# Altium PCB Project2_B.PcbDoc
Units mil, origin at the board's own origin, x right, y up, seen from the top; angles counter-clockwise.
Board outline 6000 x 4000 mil, 2 copper layers (Top Layer, Bottom Layer); 93 components, 85 nets, 391 pads, 12 vias.
Unrouted connection lines stored in the file: 248.
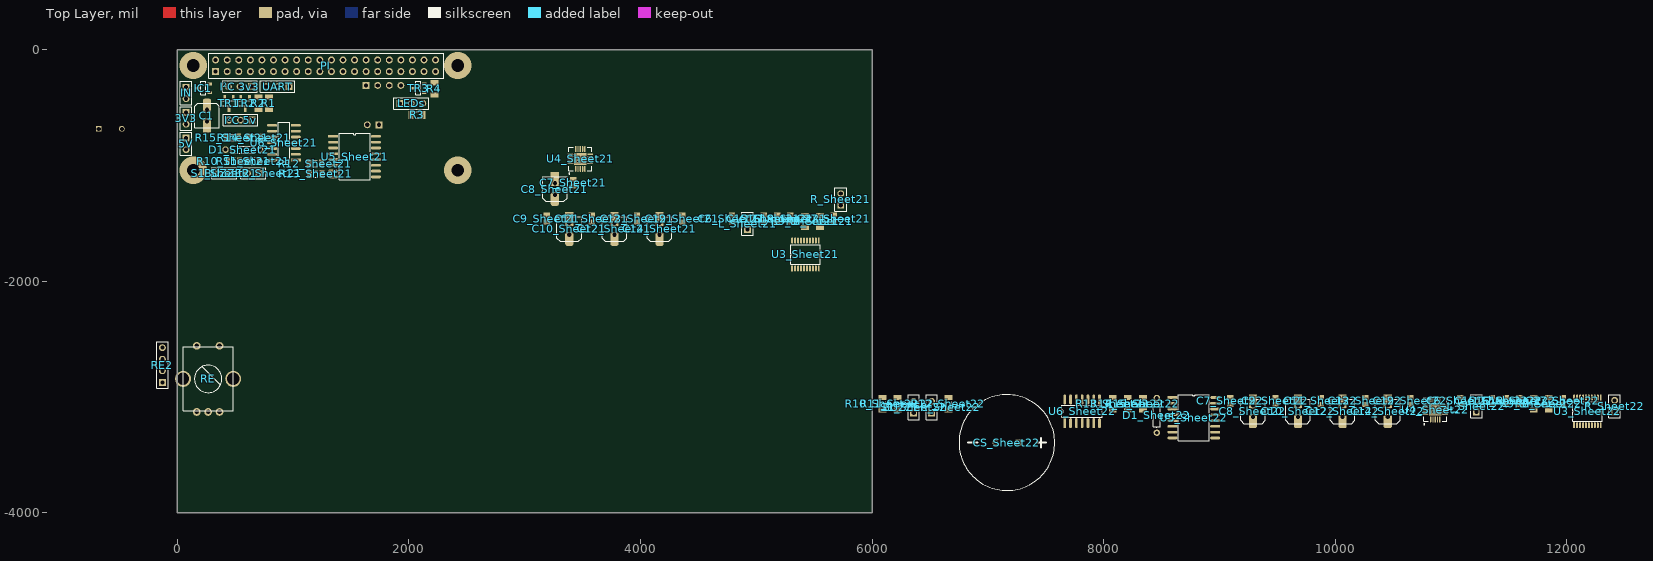
[diagram p0: Top Layer view]
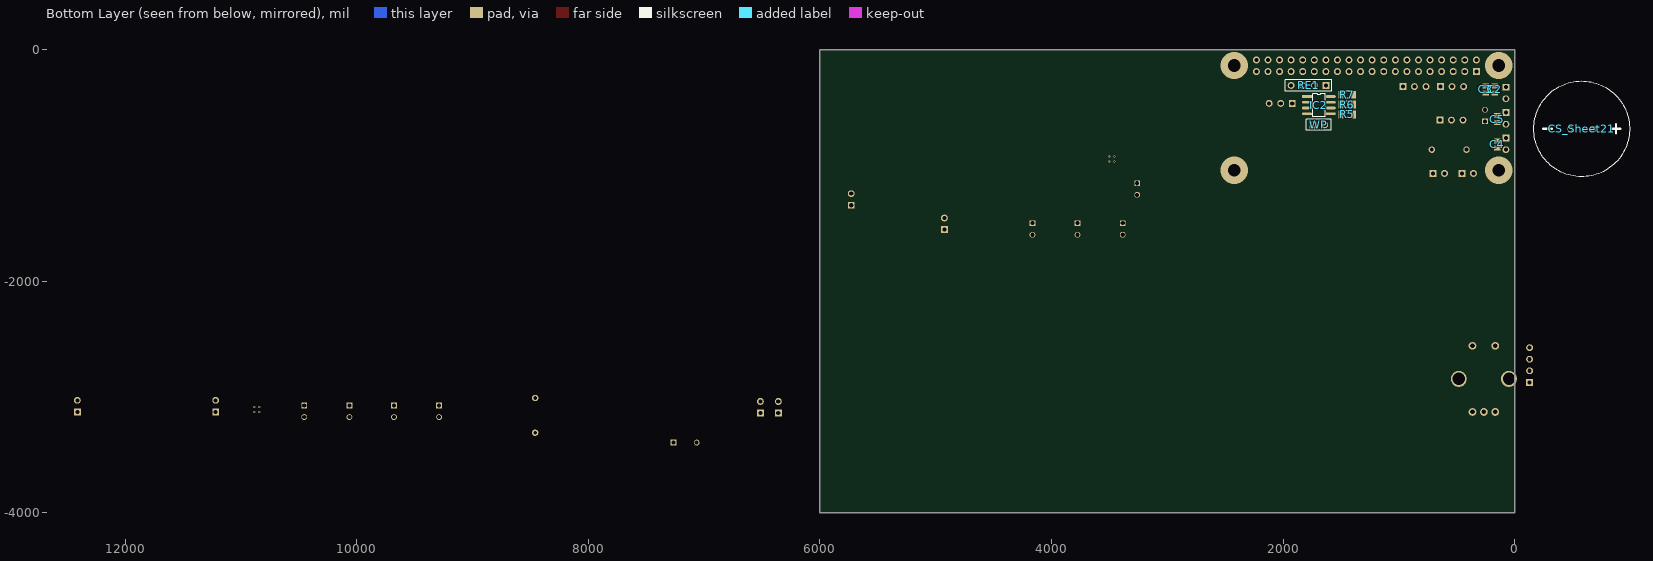
[diagram p1: Bottom Layer view, seen from below]

## Layer stack, top to bottom
Top Solder: solder mask 0.4, Solder Resist, Dk 3.5
Top Layer: signal copper 1.4
Dielectric 1: dielectric 12.6, FR-4, Dk 4.8
Bottom Layer: signal copper 1.4
Bottom Solder: solder mask 0.4, Solder Resist, Dk 3.5

## Board outline
0,-4000 6000,-4000 6000,0 0,0

## Design rules (kind name [scope] priority, off if disabled: settings)
Clearance [All] p1: gap=10
PolygonConnect [All] p1: connectstyle=Relief reliefconductorwidth=10 reliefentries=4 polygonreliefangle="90 Angle" airgapwidth=10
RoutingVias [All] p1: holewidth=28 width=50 viastyle="Through Hole" minholewidth=28 minwidth=50 maxholewidth=28 maxwidth=50
SolderMaskExpansion [All] p1: expansion=4
Width [All] p1: maxlimit=10 minlimit=10 preferedwidth=10
30 further rules are at their usual default settings.

## Classes and differential pairs
channel class Sheet2: Sheet21 Sheet22

## Components (designator, comment, footprint, x,y, rotation, side; value= is the part's Value field where it differs from the comment)
3V3 "" HDR1X2#1 75,-545 r270 top
5V "" HDR1X2#1 75,-765 r270 top
BUZZER_Sheet21 "" HDR1X2#2 705,-1070 r180 top (schematic designator BUZZER)
BUZZER_Sheet22 "" HDR1X2#2 6515,-3140 r90 top (schematic designator BUZZER)
C1 "" "SMD cap 6x5" 255,-570 r270 top
C2 "" C0805 170,-345 r270 bottom
C3 "" C0805 250,-345 r270 bottom
C4 "" C0805 150,-820 r90 bottom
C5 "" C0805 150,-600 r270 bottom
C6_Sheet21 "" C0805 4790,-1460 r90 top (schematic designator C6)
C6_Sheet22 "" C0805 11080,-3035 r90 top (schematic designator C6)
C7_Sheet21 "" C0805 3420,-1150 r270 top (schematic designator C7)
C7_Sheet22 "" C0805 9095,-3035 r90 top (schematic designator C7)
C8_Sheet21 "" "SMD cap 6x5" 3260,-1205 r90 top (schematic designator C8)
C8_Sheet22 "" "SMD cap 6x5" 9290,-3125 r90 top (schematic designator C8)
C9_Sheet21 "" C0805 3190,-1460 r90 top (schematic designator C9)
C9_Sheet22 "" C0805 9485,-3035 r90 top (schematic designator C9)
C10_Sheet21 "" "SMD cap 6x5" 3385,-1550 r90 top (schematic designator C10)
C10_Sheet22 "" "SMD cap 6x5" 9680,-3125 r90 top (schematic designator C10)
C11_Sheet21 "" C0805 3580,-1460 r90 top (schematic designator C11)
C11_Sheet22 "" C0805 9875,-3035 r90 top (schematic designator C11)
C12_Sheet21 "" "SMD cap 6x5" 3775,-1550 r90 top (schematic designator C12)
C12_Sheet22 "" "SMD cap 6x5" 10065,-3125 r90 top (schematic designator C12)
C13_Sheet21 "" C0805 3970,-1460 r90 top (schematic designator C13)
C13_Sheet22 "" C0805 10260,-3035 r90 top (schematic designator C13)
C14_Sheet21 "" "SMD cap 6x5" 4165,-1550 r90 top (schematic designator C14)
C14_Sheet22 "" "SMD cap 6x5" 10455,-3125 r90 top (schematic designator C14)
C15_Sheet21 "" C0805 5065,-1460 r90 top (schematic designator C15)
C15_Sheet22 "" C0805 11355,-3035 r90 top (schematic designator C15)
C16_Sheet21 "" C0805 5180,-1460 r90 top (schematic designator C16)
C16_Sheet22 "" C0805 11475,-3035 r90 top (schematic designator C16)
C17_Sheet21 "" C0805 5670,-1460 r90 top (schematic designator C17)
C17_Sheet22 "" C0805 11965,-3035 r90 top (schematic designator C17)
C18_Sheet21 "" C0805 5295,-1460 r90 top (schematic designator C18)
C18_Sheet22 "" C0805 11590,-3035 r90 top (schematic designator C18)
C19_Sheet21 "" C0805 4360,-1460 r90 top (schematic designator C19)
C19_Sheet22 "" C0805 10650,-3035 r90 top (schematic designator C19)
CS_Sheet21 "Supercap" Supercap -580,-685 r180 bottom (schematic designator CS)
CS_Sheet22 "Supercap" Supercap 7165,-3395 r0 top (schematic designator CS)
D1_Sheet21 "" AXIAL-0.3 565,-865 r0 top (schematic designator D1)
D1_Sheet22 "" AXIAL-0.3 8460,-3160 r90 top (schematic designator D1)
IC1 "3v3" SOT-23A 225,-335 r90 top
IC2 "I²C SERIAL EEPROM" SOIC-8 1690,-480 r180 bottom
IN "" HDR1X2#1 75,-325 r270 top
"I²C 3v3" "" HDR1X3 640,-320 r180 top
"I²C 5v" "" HDR1X3 645,-610 r180 top
L_Sheet21 "" HDR1X2#1 4925,-1555 r90 top (schematic designator L)
L_Sheet22 "" HDR1X2#1 11220,-3130 r90 top (schematic designator L)
LEDs "WS2812" HDR1X3 1920,-465 r0 top
PI "Raspberry Pi v2" HDR2x10 1280,-140 r90 top locked
R1 "" C1206 790,-465 r90 top
R2 "" C1206 700,-465 r90 top
R3 "" C1206 2070,-565 r180 top
R4 "" C1206 2220,-340 r90 top
R5 "" C1206 1445,-560 r180 bottom
R6 "" C1206 1445,-475 r180 bottom
R7 "" C1206 1445,-390 r180 bottom
R8_Sheet21 "" C1206 5550,-1485 r90 top (schematic designator R8)
R8_Sheet22 "" C1206 11845,-3060 r90 top (schematic designator R8)
R9_Sheet21 "" C1206 5420,-1485 r90 top (schematic designator R9)
R9_Sheet22 "" C1206 11715,-3060 r90 top (schematic designator R9)
R10_Sheet21 "" C1206 485,-965 r180 top (schematic designator R10)
R10_Sheet22 "" C1206 6090,-3060 r90 top (schematic designator R10)
R11_Sheet21 "" C1206 655,-965 r180 top (schematic designator R11)
R11_Sheet22 "" C1206 6220,-3060 r90 top (schematic designator R11)
R12_Sheet21 "" C1206 1190,-985 r0 top (schematic designator R12)
R12_Sheet22 "" C1206 6660,-3060 r90 top (schematic designator R12)
R13_Sheet21 "" C1206 1195,-1075 r0 top (schematic designator R13)
R13_Sheet22 "" C1206 8080,-3060 r90 top (schematic designator R13)
R14_Sheet21 "" C1206 665,-760 r180 top (schematic designator R14)
R14_Sheet22 "" C1206 8210,-3060 r90 top (schematic designator R14)
R15_Sheet21 "" C1206 475,-760 r180 top (schematic designator R15)
R15_Sheet22 "" C1206 8340,-3060 r90 top (schematic designator R15)
R_Sheet21 "" HDR1X2#1 5730,-1345 r90 top (schematic designator R)
R_Sheet22 "" HDR1X2#1 12415,-3130 r90 top (schematic designator R)
RE "" EC11E-WP 265,-2845 r0 top
RE1 "RotaryEncoder" HDR1X4 1630,-310 r0 bottom
RE2 "RotaryEncoder" HDR1X4 -130,-2875 r90 top
S1_Sheet21 "Alarm reset" HDR1X2#2 455,-1070 r180 top (schematic designator S1)
S1_Sheet22 "Alarm reset" HDR1X2#2 6360,-3140 r90 top (schematic designator S1)
TR1 "Level shifter" SOT-23A 445,-465 r180 top
TR2 "Level shifter" SOT-23A 585,-465 r180 top
TR3 "Level shifter" SOT-23A 2080,-335 r90 top
U3_Sheet21 "I²S DAC" TSSOP-20 5310,-1890 r90 top (schematic designator U3)
U3_Sheet22 "I²S DAC" TSSOP-20 12065,-3245 r90 top (schematic designator U3)
U4_Sheet21 "TPA2016D2" QFN20-tpa2016d2 3480,-945 r90 top (schematic designator U4)
U4_Sheet22 "TPA2016D2" QFN20-tpa2016d2 10865,-3110 r90 top (schematic designator U4)
U5_Sheet21 "DS3231 RTC" "DS3231 SO-16" 1530,-925 r0 top (schematic designator U5)
U5_Sheet22 "DS3231 RTC" "DS3231 SO-16" 8780,-3180 r0 top (schematic designator U5)
U6_Sheet21 "NOR gates" SOIC-14 920,-805 r180 top (schematic designator U6)
U6_Sheet22 "NOR gates" SOIC-14 7815,-3125 r90 top (schematic designator U6)
UART "" HDR1X3 965,-320 r180 top
WP "Jumper" HDR1X2#2 1740,-650 r180 bottom

## Footprints (in the part's own frame and the unit in brackets; to place one, negate y for a bottom-side part, rotate by r counter-clockwise, add the part's x,y. Pads: shape width x height; smd on the part's side, far side on the other; paste and mask are expansions set on the pad)
AXIAL-0.3 [mm] "Axial Device, Thru-Hole; 2 Leads; 0.3 in Pin Spacing"
  round 1.4 hole 0.85: 1(-3.81,0) 2(3.81,0)
  silkscreen extent -2.77,-0.76 2.77,0.76
C0805 [mm] "Chip Capacitor, Body 2.0x1.3mm, IPC High Density"
  rect 1.1x1.4 smd: 1(-0.75,0) 2(0.75,0)
  body extent -1.1,-0.72 1.1,0.72, height 1.4
C1206 [mm] "Chip Capacitor, Body 3.2x1.6mm, IPC High Density"
  rect 1.1x1.7 smd: 1(-1.35,0) 2(1.35,0)
  silkscreen extent -0.4,-0.75 0.4,0.75, body extent -1.7,-0.9 1.7,0.9, height 1.3
"DS3231 SO-16" [mm]
  rect 2.2x0.6 smd: 1(-4.685,4.445)
  oval 2.2x0.6 smd: 2(-4.685,3.175) 3(-4.685,1.905) 4(-4.685,0.635) 5(-4.685,-0.635) 6(-4.685,-1.905) 7(-4.685,-3.175) 8(-4.685,-4.445) 9(4.685,-4.445) 10(4.685,-3.175) 11(4.685,-1.905) 12(4.685,-0.635) 13(4.685,0.635) 14(4.685,1.905) 15(4.685,3.175) 16(4.685,4.445)
  silkscreen extent -3.38,-5.08 3.41,5.08
EC11E-WP [mm] "With push button"
  round 3.5 hole 2.7: 0(-5.5,0) 0(5.5,0)
  round 1.7 hole 1: 1(-2.5,-7.25) 2(0,-7.25) 3(2.5,-7.25) 4(-2.5,7.25) 5(2.5,7.25)
  silkscreen extent -5.5,-7 5.5,7
HDR1X2#1 [mm] "Connector; Header; 2 Position"
  rect 1.5x1.5 hole 0.9: 1(0,0)
  round 1.5 hole 0.9: 2(2.54,0)
  silkscreen extent -1.27,-1.27 3.81,1.27
HDR1X2#2 [mm] "2 Pin Header"
  rect 1.524x1.524 hole 0.9: 1(0,0)
  round 1.524 hole 0.9: 2(2.54,0)
  silkscreen extent -1.5,-1.2 4,1.2
HDR1X3 [mm] "Connector; Header; 3 Position"
  rect 1.5x1.5 hole 0.9: 1(0,0)
  round 1.5 hole 0.9: 2(2.54,0) 3(5.08,0)
  silkscreen extent -1.27,-1.27 6.35,1.27
HDR1X4 [mm] "Connector; Header; 4 Position"
  rect 1.5x1.5 hole 0.9: 1(0,0)
  round 1.5 hole 0.9: 2(2.54,0) 3(5.08,0) 4(7.62,0)
  silkscreen extent -1.27,-1.27 8.89,1.27
HDR2x10 [mil] "20 pin Header"
  rect 60x60 hole 35.43: 1(-50,950)
  round 60 hole 35.43: 2(50,950) 3(-50,850) 4(50,850) 5(-50,750) 6(50,750) 7(-50,650) 8(50,650) 9(-50,550) 10(50,550) 11(-50,450) 12(50,450) 13(-50,350) 14(50,350) 15(-50,250) 16(50,250) 17(-50,150) 18(50,150) 19(-50,50) 20(50,50) 21(-50,-50) 22(50,-50) 23(-50,-150) 24(50,-150) 25(-50,-250) 26(50,-250) 27(-50,-350) 28(50,-350) 29(-50,-450) 30(50,-450) 31(-50,-550) 32(50,-550) 33(-50,-650) 34(50,-650) 35(-50,-750) 36(50,-750) 37(-50,-850) 38(50,-850) 39(-50,-950) 40(50,-950)
  silkscreen extent -109,-1019 107,1009
QFN20-tpa2016d2 [mm] "QFN, 20-Leads, Body 4,77x4,77mm, Pitch 0,50mm, Thermal Pad 2,70x2,70mm, IPC Low Density"
  rect 2.7x2.7 smd: 0(0,0)
  oct 1.3x0.3 smd: 1(-2.175,1)
  oval 1.3x0.3 smd: 2(-2.175,0.5) 3(-2.175,0) 4(-2.175,-0.5) 5(-2.175,-1) 11(2.175,-1) 12(2.175,-0.5) 13(2.175,0) 14(2.175,0.5) 15(2.175,1)
  oval 0.3x1.3 smd: 6(-1,-2.175) 7(-0.5,-2.175) 8(0,-2.175) 9(0.5,-2.175) 10(1,-2.175) 16(1,2.175) 17(0.5,2.175) 18(0,2.175) 19(-0.5,2.175) 20(-1,2.175)
  silkscreen extent -3.32,-2.55 2.55,2.55, body extent -2.4,-2.4 2.4,2.4, height 0.8
"SMD cap 6x5" [mm]
  rrect50% 3x1.8 smd: 1(-2.2,0)
  round 1.27 hole 0.9: 1(-1.27,0)
  rect 1.27x1.27 hole 0.9: 2(1.27,0)
  rect 3x1.8 smd: 2(2.2,0)
  silkscreen extent -2.7,-2.7 2.7,2.7
SOIC-8 [mm]
  rect 2.2x0.6 smd: 1(-2.6,1.905)
  oval 2.2x0.6 smd: 2(-2.6,0.635) 3(-2.6,-0.635) 4(-2.6,-1.905) 5(2.6,-1.905) 6(2.6,-0.635) 7(2.6,0.635) 8(2.6,1.905)
  silkscreen extent -1.33,-2.54 1.34,2.54
SOIC-14 [mm]
  rect 2.2x0.6 smd: 1(-2.6,3.81)
  oval 2.2x0.6 smd: 2(-2.6,2.54) 3(-2.6,1.27) 4(-2.6,0) 5(-2.6,-1.27) 6(-2.6,-2.54) 7(-2.6,-3.81) 8(2.6,-3.81) 9(2.6,-2.54) 10(2.6,-1.27) 11(2.6,0) 12(2.6,1.27) 13(2.6,2.54) 14(2.6,3.81)
  silkscreen extent -1.3,-4.44 1.3,4.44
SOT-23A [mm]
  rrect50% 0.6x1 smd: 1(-0.95,-1.35)
  rect 0.6x1 smd: 2(0.95,-1.35) 3(0,1.35)
  silkscreen extent -1.45,-0.55 1.55,0.55
Supercap [mm] "Supercap"
  rect 1.27x1.27 hole 0.9: 1(2.54,0)
  round 1.27 hole 0.9: 2(-2.54,0)
  silkscreen extent -10.5,-10.5 10.5,10.5
TSSOP-20 [mm]
  rect 1.3x0.4 smd: 1(0,0)
  oval 1.3x0.4 smd: 2(0,-0.65) 3(0,-1.3) 4(0,-1.95) 5(0,-2.6) 6(0,-3.25) 7(0,-3.9) 8(0,-4.55) 9(0,-5.2) 10(0,-5.85) 11(6.1,-5.85) 12(6.1,-5.2) 13(6.1,-4.55) 14(6.1,-3.9) 15(6.1,-3.25) 16(6.1,-2.6) 17(6.1,-1.95) 18(6.1,-1.3) 19(6.1,-0.65) 20(6.1,0)
  silkscreen extent 0.9,-6.18 5.2,0.33

## Part data
3V3 5V IN L_Sheet21 L_Sheet22 R_Sheet21 R_Sheet22: library part "Header 2", "Header, 2-Pin"
BUZZER_Sheet21 BUZZER_Sheet22: library part Bell, "Electrical Bell"
C1 CS_Sheet21 CS_Sheet22: library part "Cap Pol1", "Polarized Capacitor (Radial)"
C2 C3 C4 C5 C6_Sheet21 C6_Sheet22 C7_Sheet21 C7_Sheet22 C9_Sheet21 C9_Sheet22 C11_Sheet21 C11_Sheet22 C13_Sheet21 C13_Sheet22 C15_Sheet21 C15_Sheet22 C16_Sheet21 C16_Sheet22 C17_Sheet21 C17_Sheet22 C18_Sheet21 C18_Sheet22 C19_Sheet21 C19_Sheet22: library part Cap, "Capacitor"
C8_Sheet21 C8_Sheet22 C10_Sheet21 C10_Sheet22 C12_Sheet21 C12_Sheet22 C14_Sheet21 C14_Sheet22: library part "Cap Pol2", "Polarized Capacitor (Axial)"
D1_Sheet21 D1_Sheet22: library part Diode, "Default Diode"
IC1: library part MCP1703, "Power regulator"
"I²C 3v3" "I²C 5v" LEDs UART: library part "Header 3", "Header, 3-Pin"
PI: library part RaspberryPiV2, "Raspberry Pi v2 Header"
R1 R2 R3 R4 R5 R6 R7 R8_Sheet21 R8_Sheet22 R9_Sheet21 R9_Sheet22 R10_Sheet21 R10_Sheet22 R11_Sheet21 R11_Sheet22 R12_Sheet21 R12_Sheet22 R13_Sheet21 R13_Sheet22 R14_Sheet21 R14_Sheet22 R15_Sheet21 R15_Sheet22: library part Res2, "Resistor"
RE: library part RotaryEncoder
RE1 RE2: library part "Header 4", "Header, 4-Pin"
S1_Sheet21 S1_Sheet22: library part SW-PB, "Switch"
TR1 TR2 TR3: library part AN10441, "Level Shifter"
U3_Sheet21 U3_Sheet22: library part PCM5102A
U4_Sheet21 U4_Sheet22: "I²C Audio Amplifier"
U5_Sheet21 U5_Sheet22: library part DS3231, "RTC"
U6_Sheet21 U6_Sheet22: library part 744002, "Dual 4-input NOR gate"

## Via types
v1: diameter 19.68, hole 7.87, Top Layer to Bottom Layer, 8 vias
v2: diameter 236.22, hole 108.27, Top Layer to Bottom Layer, 4 vias

## Nets (pads, with @x,y where several pads share a name; then routed paths per layer and width w, separated by ;. In a path a pad name is that pad's centre, name@x,y a point inside that pad or via, vN(x,y) a via of type N, cw(c..) or ccw(c..) an arc to the next point about the centre after c; other vN are vias at no path point)
3V3: 3V3.1 C3.2 C5.1 C7_Sheet21.1 C7_Sheet22.1 C8_Sheet21.1 C8_Sheet22.1 C9_Sheet21.1 C9_Sheet22.1 C10_Sheet21.1 C10_Sheet22.1 C11_Sheet21.2 C11_Sheet22.2 C12_Sheet21.1 C12_Sheet22.1 C13_Sheet21.1 C13_Sheet22.1 C14_Sheet21.1 C14_Sheet22.1 IC1.2 U3_Sheet21.1 U3_Sheet21.8 U3_Sheet21.18 U3_Sheet21.20 U3_Sheet22.1 U3_Sheet22.8 U3_Sheet22.18 U3_Sheet22.20
3V3PI: IC2.8 PI.1 PI.17 R4.1 R5.2 R6.2 R7.2 TR1.1 TR2.1 TR3.1
5V: 5V.1 C1.1 C2.2 C4.2 D1_Sheet21.1 D1_Sheet22.1 IC1.3 IN.1 LEDs.3 PI.2 PI.4 R1.2 R2.2 R3.1 U4_Sheet21.4 U4_Sheet21.5 U4_Sheet21.11 U4_Sheet21.12 U4_Sheet21.13 U4_Sheet22.4 U4_Sheet22.5 U4_Sheet22.11 U4_Sheet22.12 U4_Sheet22.13 U5_Sheet21.2 U5_Sheet22.2
5VBCK: CS_Sheet21.1 CS_Sheet22.1 R15_Sheet21.2 R15_Sheet22.2 S1_Sheet21.1 S1_Sheet22.1 U5_Sheet21.14 U5_Sheet22.14 U6_Sheet21.14 U6_Sheet22.14
BUZZ: PI.37 R12_Sheet22.2 R13_Sheet22.2
"CE 0": PI.24
"CE 1": PI.26
CLK: PI.12 U3_Sheet22.13
DC: PI.15
DIN: PI.38
DOUT: PI.40 U3_Sheet22.14
FS: PI.35 U3_Sheet22.15
GND: 3V3.2 5V.2 "I²C 3v3.1" "I²C 5v.1" BUZZER_Sheet21.2 BUZZER_Sheet22.2 C1.2 C2.1 C3.1 C4.1 C5.2 C6_Sheet21.1 C6_Sheet22.1 C7_Sheet21.2 C7_Sheet22.2 C8_Sheet21.2 C8_Sheet22.2 C9_Sheet21.2 C9_Sheet22.2 C10_Sheet21.2 C10_Sheet22.2 C11_Sheet21.1 C11_Sheet22.1 C12_Sheet21.2 C12_Sheet22.2 C13_Sheet21.2 C13_Sheet22.2 C14_Sheet21.2 C14_Sheet22.2 C15_Sheet21.2 C15_Sheet22.2 C16_Sheet21.2 C16_Sheet22.2 CS_Sheet21.2 CS_Sheet22.2 IC1.1 IC2.1 IC2.2 IC2.3 IC2.4 IN.2 LEDs.1 PI.6 PI.9 PI.14 PI.20 PI.25 PI.30 PI.34 PI.39 R11_Sheet21.1 R11_Sheet22.1 R12_Sheet21.1 R12_Sheet22.1 RE1.4 U3_Sheet21.3 U3_Sheet21.9 U3_Sheet21.10 U3_Sheet21.11 U3_Sheet21.12 U3_Sheet21.16 U3_Sheet21.19 U3_Sheet22.3 U3_Sheet22.9 U3_Sheet22.10 U3_Sheet22.11 U3_Sheet22.12 U3_Sheet22.16 U3_Sheet22.19 U4_Sheet21.1 U4_Sheet21.3 U4_Sheet21.8 U4_Sheet22.1 U4_Sheet22.3 U4_Sheet22.8 U5_Sheet21.13 U5_Sheet22.13 U6_Sheet21.3 U6_Sheet21.7 U6_Sheet21.10 U6_Sheet22.3 U6_Sheet22.7 U6_Sheet22.10 UART.1 WP.1
MISO: PI.21
MOSI: PI.19
NetBUZZER_Sheet21_1: BUZZER_Sheet21.1 R13_Sheet21.1 U6_Sheet21.1 U6_Sheet21.9
NetBUZZER_Sheet22_1: BUZZER_Sheet22.1 R13_Sheet22.1 U6_Sheet22.1 U6_Sheet22.9
NetC6_Sheet21_2: C6_Sheet21.2 U3_Sheet21.5
NetC6_Sheet22_2: C6_Sheet22.2 U3_Sheet22.5
NetC15_Sheet21_1: C15_Sheet21.1 C18_Sheet21.2 R9_Sheet21.2
NetC15_Sheet22_1: C15_Sheet22.1 C18_Sheet22.2 R9_Sheet22.2
NetC16_Sheet21_1: C16_Sheet21.1 C17_Sheet21.2 R8_Sheet21.2
NetC16_Sheet22_1: C16_Sheet22.1 C17_Sheet22.2 R8_Sheet22.2
NetC17_Sheet21_1: C17_Sheet21.1 U4_Sheet21.15
NetC17_Sheet22_1: C17_Sheet22.1 U4_Sheet22.15
NetC18_Sheet21_1: C18_Sheet21.1 U4_Sheet21.2
NetC18_Sheet22_1: C18_Sheet22.1 U4_Sheet22.2
NetC19_Sheet21_1: C19_Sheet21.1 U3_Sheet21.2
NetC19_Sheet21_2: C19_Sheet21.2 U3_Sheet21.4
NetC19_Sheet22_1: C19_Sheet22.1 U3_Sheet22.2
NetC19_Sheet22_2: C19_Sheet22.2 U3_Sheet22.4
NetD1_Sheet21_2: D1_Sheet21.2 R14_Sheet21.1
NetD1_Sheet22_2: D1_Sheet22.2 R14_Sheet22.1
NetIC2_5: IC2.5 PI.27 R5.1
NetIC2_6: IC2.6 PI.28 R6.1
NetIC2_7: IC2.7 R7.1 WP.2
"NetI²C 5v_2": "I²C 5v.2" R2.1 TR2.3 U4_Sheet21.17 U5_Sheet21.16
"NetI²C 5v_3": "I²C 5v.3" R1.1 TR1.3 U4_Sheet21.19 U5_Sheet21.15
NetL_Sheet21_1: L_Sheet21.1 U4_Sheet21.7
NetL_Sheet21_2: L_Sheet21.2 U4_Sheet21.6
NetL_Sheet22_1: L_Sheet22.1 U4_Sheet22.7
NetL_Sheet22_2: L_Sheet22.2 U4_Sheet22.6
NetLEDs_2: LEDs.2 R3.2 TR3.3
NetR8_Sheet21_1: R8_Sheet21.1 U3_Sheet21.7
NetR8_Sheet22_1: R8_Sheet22.1 U3_Sheet22.7
NetR9_Sheet21_1: R9_Sheet21.1 U3_Sheet21.6
NetR9_Sheet22_1: R9_Sheet22.1 U3_Sheet22.6
NetR10_Sheet21_1: R10_Sheet21.1 R11_Sheet21.2
NetR10_Sheet21_2: R10_Sheet21.2 S1_Sheet21.2 U6_Sheet21.12
NetR10_Sheet22_2: R10_Sheet22.2 S1_Sheet22.2 U6_Sheet22.12
NetR12_Sheet21_2: R12_Sheet21.2 R13_Sheet21.2
NetR14_Sheet21_2: R14_Sheet21.2 R15_Sheet21.1
NetR14_Sheet22_2: R14_Sheet22.2 R15_Sheet22.1
NetR_Sheet21_1: R_Sheet21.1 U4_Sheet21.9
NetR_Sheet21_2: R_Sheet21.2 U4_Sheet21.10
NetR_Sheet22_1: R_Sheet22.1 U4_Sheet22.9
NetR_Sheet22_2: R_Sheet22.2 U4_Sheet22.10
NetRE2_1: RE2.1 RE.1
NetRE2_2: RE2.2 RE.3
NetRE2_3: RE2.3 RE.4
NetRE2_4: RE2.4 RE.2 RE.5
NetU3_Sheet21_13: U3_Sheet21.13
NetU3_Sheet21_14: U3_Sheet21.14
NetU3_Sheet21_15: U3_Sheet21.15
NetU4_Sheet22_17: U4_Sheet22.17 U5_Sheet22.16
NetU4_Sheet22_19: U4_Sheet22.19 U5_Sheet22.15
NetU5_Sheet21_3: U5_Sheet21.3 U6_Sheet21.2
NetU5_Sheet22_3: U5_Sheet22.3 U6_Sheet22.2
NetU6_Sheet21_4: U6_Sheet21.4
NetU6_Sheet21_5: U6_Sheet21.5 U6_Sheet21.13
NetU6_Sheet21_11: U6_Sheet21.11
NetU6_Sheet22_5: U6_Sheet22.5 U6_Sheet22.13
"PWM 0": PI.32
"PWM 1": PI.33 R4.2 TR3.2
RE_A: PI.7 RE1.1
RE_B: PI.29 RE1.2
RE_S: PI.31 RE1.3
RESET: PI.16 PI.22 U6_Sheet22.11
RX: PI.10 UART.2
SCK: "I²C 3v3.2" PI.5 TR2.2
SCLK: PI.23
SDA: "I²C 3v3.3" PI.3 TR1.2
SET: PI.18 U6_Sheet22.4
SW: PI.13 R10_Sheet22.1 R11_Sheet22.2
TX: PI.8 UART.3
pads on no net: PI.11 PI.36 RE.0 U3_Sheet21.17 U3_Sheet22.17 U4_Sheet21.0 U4_Sheet21.14 U4_Sheet21.16 U4_Sheet21.18 U4_Sheet21.20 U4_Sheet22.0 U4_Sheet22.14 U4_Sheet22.16 U4_Sheet22.18 U4_Sheet22.20 U5_Sheet21.1 U5_Sheet21.4 U5_Sheet21.5 U5_Sheet21.6 U5_Sheet21.7 U5_Sheet21.8 U5_Sheet21.9 U5_Sheet21.10 U5_Sheet21.11 U5_Sheet21.12 U5_Sheet22.1 U5_Sheet22.4 U5_Sheet22.5 U5_Sheet22.6 U5_Sheet22.7 U5_Sheet22.8 U5_Sheet22.9 U5_Sheet22.10 U5_Sheet22.11 U5_Sheet22.12 U6_Sheet21.6 U6_Sheet21.8 U6_Sheet22.6 U6_Sheet22.8
copper on no net:
  other v1: 10843.35,-3131.65 10886.65,-3131.65 10843.35,-3088.35 10886.65,-3088.35 3458.35,-966.65 3501.65,-966.65 3458.35,-923.35 3501.65,-923.35
  other v2: 137.8,-1043.31 2421.26,-1043.31 137.8,-137.8 2421.26,-137.8